# Altium PCB AHT20_DEMO_V1.5.PcbDoc
Units mm, origin at the board's own origin, x right, y up, seen from the top; angles counter-clockwise.
Board outline 91.16 x 34.57 mm, 2 copper layers (Top Layer, Bottom Layer); 46 components, 46 nets, 222 pads, 95 vias.
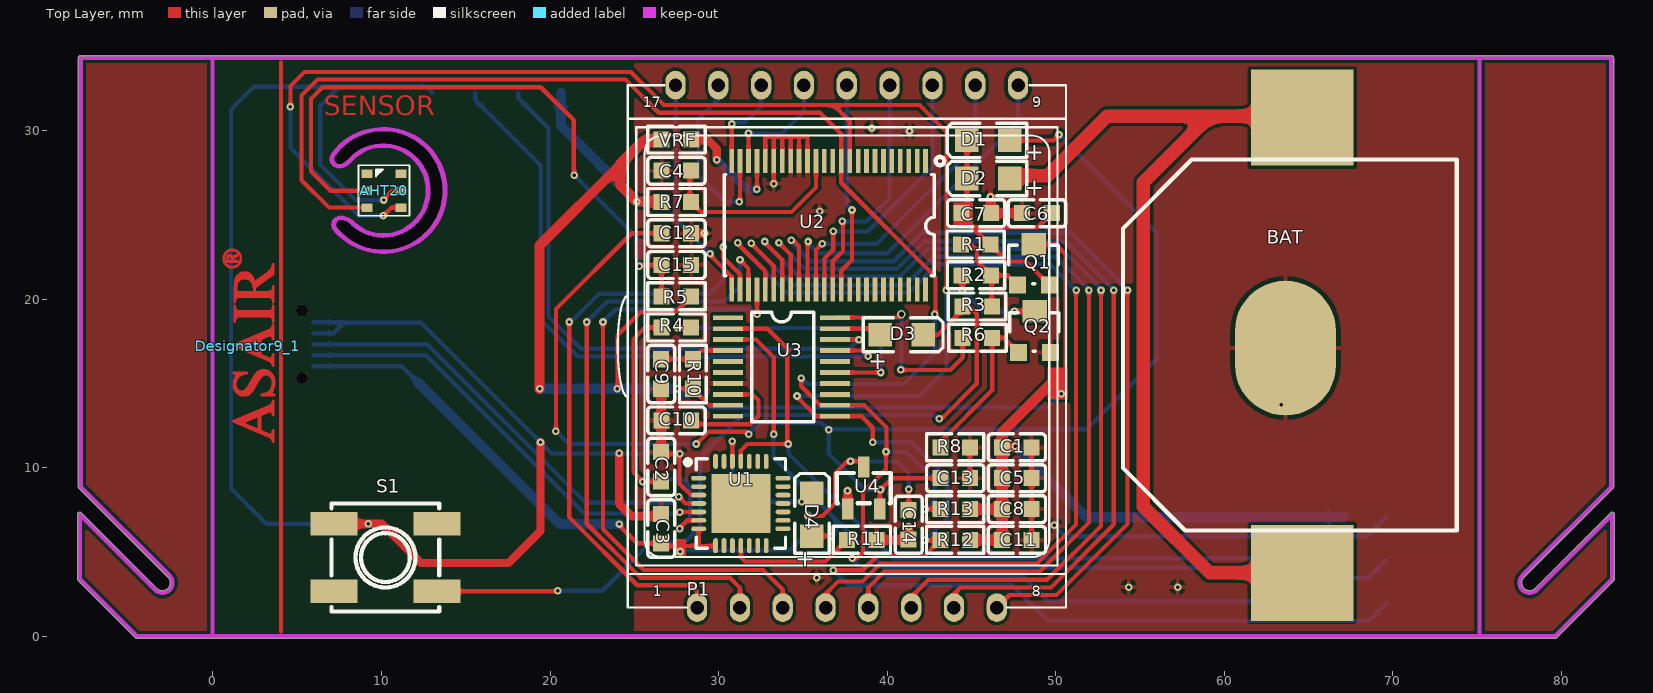
[diagram p0: Top Layer view]
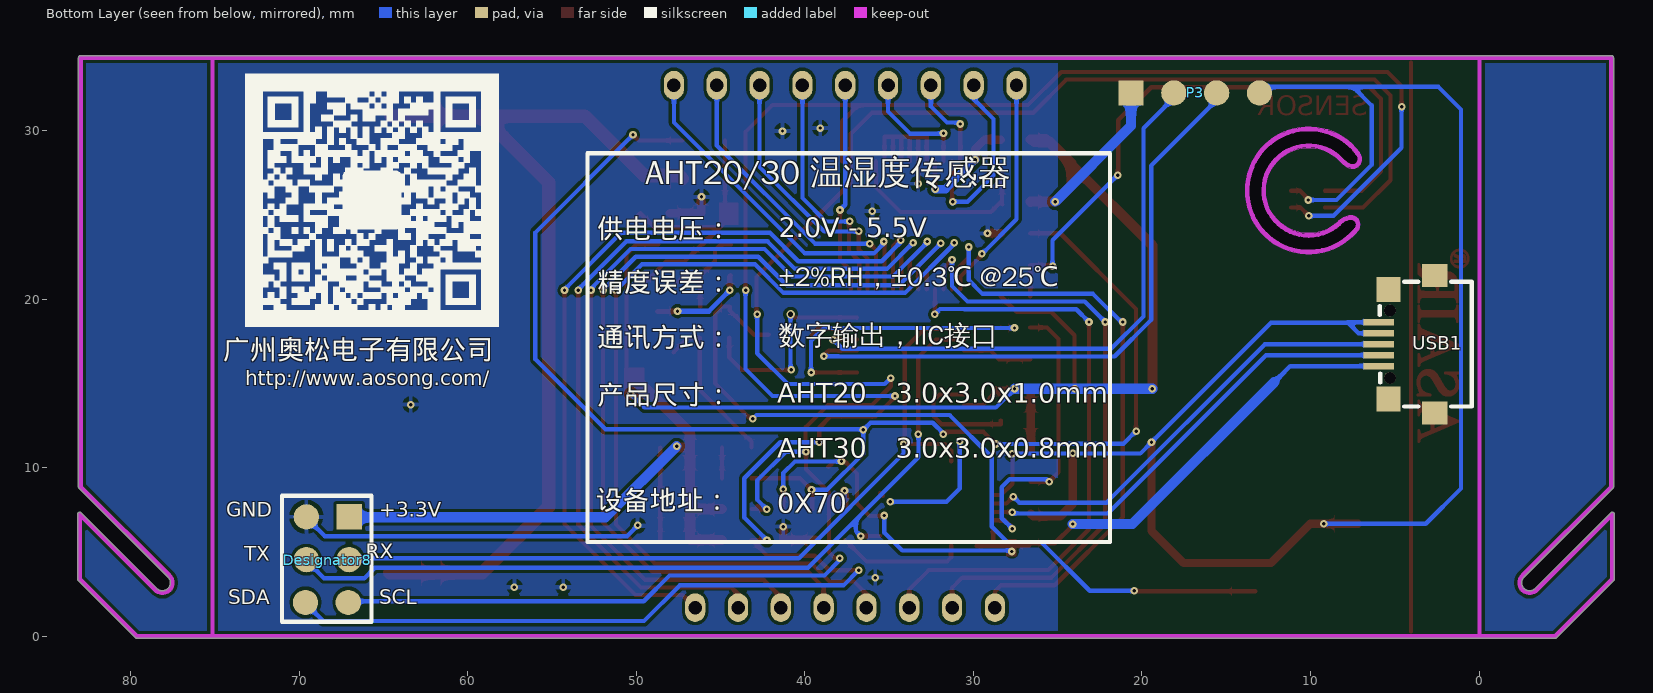
[diagram p1: Bottom Layer view, seen from below]

## Layer stack, top to bottom
Top Solder: solder mask 0.0102, Solder Resist, Dk 3.5
Top Layer: signal copper 0.0356
Dielectric 1: dielectric 0.32, FR-4, Dk 4.8
Bottom Layer: signal copper 0.0356
Bottom Solder: solder mask 0.0102, Solder Resist, Dk 3.5

## Board outline
-4.586,-0.09 -7.989,3.314 -7.989,3.313 cw(c-7.899,3.404) -8.027,3.404 -8.027,7.228 cw(c-7.899,7.228) -7.809,7.318 -3.316,2.825 ccw(c-2.994,3.171) -2.522,3.171 ccw(c-2.994,3.171) -2.676,3.52 ccw(c-2.994,3.171) -2.677,3.521 cw(c-2.591,3.615) -2.681,3.525 -7.939,8.783 -7.938,8.782 cw(c-7.849,8.873) -7.976,8.873 -7.976,34.315 cw(c-7.849,34.315) -7.849,34.443 82.956,34.443 cw(c82.956,34.315) 83.084,34.315 83.084,8.873 cw(c82.956,8.873) 83.046,8.782 83.046,8.783 77.789,3.525 cw(c77.699,3.615) 77.784,3.52 cw(c78.102,3.171) 77.784,3.521 ccw(c77.699,3.615) 77.789,3.525 77.784,3.52 ccw(c78.102,3.171) 78.424,2.825 82.917,7.318 cw(c83.007,7.228) 83.135,7.228 83.135,3.404 cw(c83.007,3.404) 83.097,3.313 83.097,3.314 79.694,-0.09 cw(c79.604,0) 79.604,-0.127 -4.496,-0.127 cw(c-4.496,0)
cut-out: 7.061,24.409 7.061,24.444 cw(c7.535,24.444) 7.2,24.779 7.219,24.798 cw(c7.569,24.448) 7.569,24.943 cw(c7.569,23.896) 8.31,24.636 8.378,24.568 ccw(c10.109,26.441) 12.66,26.441 ccw(c10.109,26.441) 8.276,28.215 cw(c8.184,28.303) 8.274,28.213 8.08,28.019 ccw(c7.99,28.109) 8.081,28.02 8.08,28.019 cw(c7.459,28.641) 7.459,27.762 cw(c7.459,28.236) 7.124,27.901 cw(c7.52,28.297) 6.959,28.297 6.959,28.366 cw(c7.428,28.366) 7.089,28.69 cw(c10.109,26.441) 13.874,26.441 cw(c10.109,26.441) 7.265,23.974 7.224,24.015 ccw(c7.314,24.105) 7.225,24.014 7.224,24.015 cw(c7.619,24.409)

## Design rules (kind name [scope] priority, off if disabled: settings)
Clearance [All] p1: gap=0.2 ignorepadtopadclearanceinfootprint=FALSE
ComponentClearance [All] p1 off: gap=0.2 collisioncheckmode=3 verticalgap=0.254 showdistances=FALSE
DiffPairsRouting DiffPair_DiffPairsRouting [InDifferentialPair ('USB')] p1: maxlimit=0.254 minlimit=0.254 mostfreqgap=0.254 toplayer_minwidth=0.2 toplayer_maxwidth=0.381 toplayer_prefwidth=0.381 bottomlayer_minwidth=0.2 bottomlayer_maxwidth=0.381 bottomlayer_prefwidth=0.381 maxuncoupledlength=12.7
DiffPairsRouting DiffPair_DiffPairsRouting_1 [InDifferentialPair ('USB')] p2: maxlimit=0.254 minlimit=0.254 mostfreqgap=0.254 toplayer_minwidth=0.254 toplayer_maxwidth=0.254 toplayer_prefwidth=0.254 bottomlayer_minwidth=0.254 bottomlayer_maxwidth=0.254 bottomlayer_prefwidth=0.254 maxuncoupledlength=12.7
DiffPairsRouting [All] p3: maxlimit=0.254 minlimit=0.254 mostfreqgap=0.254 toplayer_minwidth=0.381 toplayer_maxwidth=0.381 toplayer_prefwidth=0.381 bottomlayer_minwidth=0.381 bottomlayer_maxwidth=0.381 bottomlayer_prefwidth=0.381 maxuncoupledlength=12.7
HoleSize [All] p1: absolutevalues=TRUE maxlimit=2.54 minlimit=0.02 maxpercent=80.000 minpercent=20.000
MatchedLengths DiffPair_MatchedLengths [InDifferentialPair ('USB')] p1: tolerance=25.4 checknetsindiffpair=FALSE checkdiffpairvsdiffpair=TRUE checkxsignals=TRUE checkothers=TRUE
MatchedLengths DiffPair_MatchedLengths_1 [InDifferentialPair ('USB')] p2: tolerance=25.4 checknetsindiffpair=FALSE checkdiffpairvsdiffpair=TRUE checkxsignals=TRUE checkothers=TRUE
MinimumSolderMaskSliver [All] p1 off: minsoldermaskwidth=0.254
PolygonConnect [All] p1: connectstyle=Relief reliefconductorwidth=0.254 reliefentries=4 polygonreliefangle="90 Angle" airgapwidth=0.254
RoutingVias [All] p1: holewidth=0.711 width=1.27 viastyle="Through Hole" minholewidth=0.711 minwidth=1.27 maxholewidth=0.711 maxwidth=1.27
SilkToSilkClearance [All] p1 off: silktosilkclearance=0.254
SilkToSolderMaskClearance [IsPad] p1 off: minsilkscreentomaskgap=0.254 clearancetoexposedcopper=TRUE
SolderMaskExpansion [All] p1: expansion=0.102
Width [All] p1: maxlimit=2 minlimit=0.2 preferedwidth=0.254
24 further rules are at their usual default settings.

## Components (designator, comment, footprint, x,y, rotation, side; value= is the part's Value field where it differs from the comment)
AHT20 "AHT20" AHT20 8.633,24.913 r0 top
BAT "CR2032" CR2032-W 73.784,6.275 r90 top locked
C1 "106" 0603C 48.565,11.201 r180 top value=105
C2 "104" 0603c 26.594,9.169 r90 top value=10uF
C3 "4.7u" 0603C 26.594,7.264 r270 top value=105
C4 "104" 0603C 26.619,27.614 r0 top
C5 "104" 0603C 48.565,9.373 r180 top
C6 "104" 0603C 49.759,25.095 r180 top
C7 "104" 0603C 44.399,25.095 r0 top
C8 "106" 0603c 46.815,7.544 r0 top value=10uF
C9 "104" 0603C 26.594,14.681 r90 top
C10 "4.7u" 0603C 26.619,12.802 r0 top value=105
C11 "104" 0603C 48.565,5.715 r180 top
C12 "104" 0603C 28.369,23.905 r180 top value=106
C13 "104" 0603C 44.905,9.373 r180 top
C14 "104" 0603C 41.275,5.74 r90 top value=105
C15 "4.7u" 0603C 28.372,22.022 r180 top value=105
D1 "1N5819" 0805-LED 47.269,29.413 r180 top
D2 "1N5819" 0805-LED 47.269,27.153 r180 top
D3 "1N5819" 0805-LED 39.599,17.882 r0 top
D4 "1N5819" 0805-LED 35.535,5.944 r90 top
Designator8 "Comment" H-6 67.053,7.057 r0 bottom
Designator9_1 "Comment" 0603C-L 2.057,17.247 r90 top
P1 "LCD_1485B" LCD1485B 24.61,1.698 r0 top locked
P3 "ST-Link" DIP-5 20.647,32.229 r180 bottom
Q1 "ST2305" SOt23 47.727,20.828 r0 top
Q2 "2N3904" SOt23 47.777,16.84 r0 top
R1 "10K" 0603R 44.374,23.241 r0 top value=100
R2 "10K" 0603R 46.152,21.412 r180 top value=100
R3 "10K" 0603R 46.203,19.558 r180 top value=100
R4 "20K" 0603R 28.372,18.313 r180 top value=100
R5 "470" 0603R 26.619,20.168 r0 top value=4.7K
R6 "10K" 0603R 44.475,17.704 r0 top value=100
R7 "10K" 0603R 28.369,25.76 r180 top
R8 "100K" 0603R 43.155,11.201 r0 top value=100
R10 "10K" 0603R 28.473,14.681 r90 top
R11 "10K" 0603R 37.617,5.715 r0 top value=100
R12 "4.7k" 0603R 44.905,5.715 r180 top value=4.7K
R13 "4.7k" 0603R 44.905,7.544 r180 top value=4.7K
S1 "POWER" KEY 10.233,4.72 r180 top
U1 "CP2102" CP2102 31.496,7.874 r270 top
U2 "PCF8562TT" PCF8562TT 36.903,24.482 r180 top locked
U3 "HC32F003" TSSOP20 30.556,18.898 r0 top locked
U4 "6206-3.3" XC6206 38.608,8.788 r270 top
USB1 "micro 5P_C77238" USB 2.944,17.243 r90 bottom locked
VRF "1K" 0603R 26.619,29.464 r0 top value=10K

## Footprints (in the part's own frame and the unit in brackets; to place one, negate y for a bottom-side part, rotate by r counter-clockwise, add the part's x,y. Pads: shape width x height; smd on the part's side, far side on the other; paste and mask are expansions set on the pad)
0603C [mm]
  rect 0.95x0.95 smd: 1(0,0) 2(1.75,0)
  silkscreen extent -0.83,-0.8 2.58,0.8
0603c [mm]
  rect 0.95x0.95 smd: 1(0,0) 2(1.75,0)
  silkscreen extent -0.83,-0.8 2.58,0.8
0603C-L [mm]
  Top Layer drawing of 2041 lines, arcs and shapes, not listed
0603R [mm]
  rect 0.95x0.95 smd: 1(0,0) 2(1.75,0)
  silkscreen extent -0.82,-0.8 2.58,0.8
0805-LED [mil]
  rect 55x55 smd: 1(0,0) 2(100,0)
  silkscreen extent -40,-40 146,40
AHT20 [mm]
  rect 0.65x0.5 smd: 1(0.508,2.515) 2(0.508,1.515) 3(0.508,0.515) 4(2.515,0.515) 5(2.515,1.515) 6(2.515,2.515)
  silkscreen extent 0,0.03 3.02,3.02
CP2102 [mm]
  oval 0.28x0.896 smd: 1(-1.501,-2.678) 2(-1.001,-2.678) 3(-0.501,-2.678) 4(0,-2.678) 5(0.5,-2.678) 6(1.001,-2.678) 7(1.501,-2.678) 15(1.501,2.322) 16(1.001,2.322) 17(0.5,2.322) 18(0,2.322) 19(-0.501,2.322) 20(-1.001,2.322) 21(-1.501,2.322)
  oval 0.896x0.28 smd: 8(2.5,-1.679) 9(2.5,-1.179) 10(2.5,-0.678) 11(2.5,-0.178) 12(2.5,0.323) 13(2.5,0.823) 14(2.5,1.323) 22(-2.5,1.323) 23(-2.5,0.823) 24(-2.5,0.323) 25(-2.5,-0.178) 26(-2.5,-0.678) 27(-2.5,-1.179) 28(-2.5,-1.679)
  rect 3.5x3.5 smd: 29(0,-0.178)
  silkscreen extent -2.65,-3.48 2.65,2.47
CR2032-W [mil]
  rect 224.41x240.16 smd: 1(-99,360.69) 2(964,360.69)
  rect 60x60 smd: 1(-99,404)
  oval 314.96x236.22 smd: 3(426,400)
  silkscreen extent 0,0 866,780
DIP-5 [mm]
  rect 1.5x1.5 smd: 1(0,0)
  round 1.5 smd: 2(2.54,0) 3(5.08,0) 4(7.62,0)
H-6 [mm]
  rect 1.5x1.5 smd: 1(-0.025,-0.025)
  round 1.5 smd: 2(2.515,-0.025) 3(-0.025,2.515) 4(2.515,2.515) 5(0.025,5.055) 6(2.565,5.055)
KEY [mm]
  rect 2.8x1.4 smd: 1(-3.05,2.051) 2(3.05,2.051) 3(-3.05,-1.949) 4(3.05,-1.949)
  silkscreen extent -3.2,-3.15 3.2,3.25
LCD1485B [mm]
  oval 1.2x1.7 hole 0.8: 1(4.11,0) 2(6.65,0) 3(9.19,0) 4(11.73,0) 5(14.27,0) 6(16.81,0) 7(19.35,0) 8(21.89,0) 9(23.15,30.99) 10(20.61,30.99) 11(18.07,30.99) 12(15.53,30.99) 13(12.99,30.99) 14(10.45,30.99) 15(7.91,30.99) 16(5.37,30.99) 17(2.83,30.99)
  silkscreen extent -0.6,0 26,31
PCF8562TT [mil]
  rect 11x56.3 smd: 1(-211.5,-145.61) 2(-191.8,-145.61) 3(-172.11,-145.61) 4(-152.41,-145.61) 5(-132.72,-145.61) 6(-113.02,-145.61) 7(-93.33,-145.61) 8(-73.63,-145.61) 9(-53.93,-145.61) 10(-34.24,-145.61) 11(-14.54,-145.61) 12(5.16,-145.61) 13(24.85,-145.61) 14(44.54,-145.61) 15(64.24,-145.61) 16(83.94,-145.61) 17(103.63,-145.61) 18(123.33,-145.61) 19(143.02,-145.61) 20(162.72,-145.61) 21(182.41,-145.61) 22(202.11,-145.61) 23(221.8,-145.61) 24(241.5,-145.61) 25(241.5,153.61) 26(221.8,153.61) 27(202.11,153.61) 28(182.41,153.61) 29(162.72,153.61) 30(143.02,153.61) 31(123.33,153.61) 32(103.63,153.61) 33(83.94,153.61) 34(64.24,153.61) 35(44.54,153.61) 36(24.85,153.61) 37(5.16,153.61) 38(-14.54,153.61) 39(-34.24,153.61) 40(-53.93,153.61) 41(-73.63,153.61) 42(-93.33,153.61) 43(-113.02,153.61) 44(-132.72,153.61) 45(-152.41,153.61) 46(-172.11,153.61) 47(-191.8,153.61) 48(-211.5,153.61)
  silkscreen extent -255,-156 258,122
SOt23 [mil]
  rect 40x40 smd: 1(0,0) 2(75,0)
  rect 57.69x52 smd: 3(38,95.75)
  silkscreen extent -20,3 95,93
TSSOP20 [mil]
  rect 70x11 smd: 1(0,0) 2(0,-25.6) 3(0,-51.2) 4(0,-76.8) 5(0,-102.4) 6(0,-128) 7(0,-153.6) 8(0,-179.2) 9(0,-204.8) 10(0,-230.4) 11(250,-230.4) 12(250,-204.8) 13(250,-179.2) 14(250,-153.6) 15(250,-128) 16(250,-102.4) 17(250,-76.8) 18(250,-51.2) 19(250,-25.6) 20(250,0)
  silkscreen extent 55,-243 200,13
USB [mm]
  rect 1.35x1.5 smd: 0(-3.999,-0.314) 0(4.151,-0.314)
  rect 1.5x1.4 smd: 0(-3.174,2.427) 0(3.326,2.427)
  rect 0.4x1.8 smd: 1(-1.22,3.007) 2(-0.57,3.007) 3(0.08,3.007) 4(0.731,3.007) 5(1.381,3.007)
  round 0.7 hole 0.7 unplated: ""(-1.918,2.345) ""(2.08,2.345)
  silkscreen extent -3.61,-2.5 3.79,2.95
XC6206 [mm]
  rect 1.25x0.7 smd: 1(1.25,-0.95) 2(1.25,0.95) 3(-1.25,0)
  silkscreen extent -0.9,-1.6 0.9,1.6

## Part data
C1 C3 C4 C5 C6 C7 C9 C10 C11 C12 C13 C14 C15: library part Cap, "Capacitor", LatestRevisionDate=17-Jul-2002, LatestRevisionNote="Re-released for DXP Platform.", PackageReference=RAD-0.3, Published=8-Jun-2000, Publisher="Altium Limited"
C2 C8: library part "Cap Pol1", "Polarized Capacitor (Radial)", LatestRevisionDate=17-Jul-2002, LatestRevisionNote="Re-released for DXP Platform.", PackageReference=RB7.6-15, Published=8-Jun-2000, Publisher="Altium Limited"
D1 D2 D3 D4: library part "D Schottky", "Schottky Diode", Code_JEDEC=DO-214-AA, LatestRevisionDate=17-Jul-2002, LatestRevisionNote="Re-released for DXP Platform.", PackageReference=SMB, Published=8-Jun-2000, Publisher="Altium Limited"
P1: library part LED1485B, "Header, 17-Pin", LatestRevisionDate=17-Jul-2002, LatestRevisionNote="Re-released for DXP Platform.", Publisher="Altium Limited"
P3: library part "Header 4", "Header, 4-Pin", LatestRevisionDate=17-Jul-2002, LatestRevisionNote="Re-released for DXP Platform.", Publisher="Altium Limited"
Q1: library part MOSFET-P, "P-Channel MOSFET", LatestRevisionDate=17-Jul-2002, LatestRevisionNote="Re-released for DXP Platform.", PackageReference=E3, PackageVersion=1995/1996, Published=8-Jun-2000, Publisher="Altium Limited"
Q2: "NPN General Purpose Amplifier", Code_JEDEC=TO-92A, ComponentLink1Description="Manufacturer Link", ComponentLink1URL=http://www.fairchildsemi.com/, ComponentLink2Description=Datasheet, ComponentLink2URL=http://www.fairchildsemi.com/ds/2N%2F2N3904.pdf, DatasheetVersion=1997, LatestRevisionDate=15-Jan-2003, LatestRevisionNote="PCB Footprint 'BCY-W3/D4.7' replaced", PackageReference=TO-92A, PackageVersion=Sep-1998, Published=8-Jun-2000, Publisher="Altium Limited"
R1 R2 R3 R4 R5 R6 R7 R8 R10 R11 R12 R13 VRF: library part Res2, "Resistor", LatestRevisionDate=17-Jul-2002, LatestRevisionNote="Re-released for DXP Platform.", PackageReference=AXIAL-0.4, Published=8-Jun-2000, Publisher="Altium Limited"
S1: library part SW-PB, "Switch", LatestRevisionDate=17-Jul-2002, LatestRevisionNote="Re-released for DXP Platform.", PackageReference=SPST-2, Published=24-Mar-1999, Publisher="Altium Limited"
U1: library part CP2102_1
U2: BOM_LCSC Assembly=Yes, BOM_Manufacturer=NXP, BOM_BOM_Supplier=LCSC, BOM_Manufacturer Part=PCF8562TT, BOM_Supplier=LCSC, BOM_Supplier Part=C52805, SMT Type=Extend, spicePre=X, spiceSymbolName=PCF8562TT
U3: "MCU"
U4: library part XC6206P282MR_C347374, BOM_LCSC Assembly=Yes, BOM_Manufacturer="Youtai Semiconductor Co., Ltd.", BOM_Manufacturer Part=XC6206P282MR, BOM_Supplier=LCSC, BOM_Supplier Part=C347374, Contributor=LCSC, SMT Type=Extend, spicePre=U, spiceSymbolName=XC6206P282MR_C347374
USB1: BOM_Manufacturer=LCSC, BOM_Manufacturer Part=-, BOM_Supplier=LCSC, BOM_Supplier Part=C77238, Contributor=立创EDA官方封装库, spicePre=U, spiceSymbolName="micro 5P_C77238"

## Via types
v1: diameter 0.45, hole 0.2, Top Layer to Bottom Layer, 94 vias
v2: diameter 0.5, hole 0.3, Top Layer to Bottom Layer, 1 vias

## Nets (pads, with @x,y where several pads share a name; then routed paths per layer and width w, separated by ;. In a path a pad name is that pad's centre, name@x,y a point inside that pad or via, vN(x,y) a via of type N, cw(c..) or ccw(c..) an arc to the next point about the centre after c; other vN are vias at no path point)
3.3OUT: C2.1 R4.2 U1.6 | length 18.9
  Top Layer w0.254: C2.1 v1(25.502,9.169) 24.943,9.728 24.943,17.628 25.629,18.313 R4.2 ; v1(27.686,6.375) 27.686,6.433 28.126,6.873 U1.6
  Bottom Layer w0.254: v1(25.502,9.169) 25.647,9.315 27.846,9.315 28.314,8.846 28.314,7.003 v1(27.686,6.375)
+3.3AV: C12.2 C13.2 D1.1 U4.2 | length 83.1
  Top Layer w0.254: v1@20.371,12.141 v1(20.345,12.167) 20.345,19.406 24.845,23.905 C12.2 ; v1(28.677,11.405) 29.397,12.125 31.639,12.125 v1(31.775,11.989) ; U4.2 39.558,8.646 v1(39.599,8.687) 40.284,9.373 C13.2 ; D1.1 49.86,29.413 v1(50.19,29.743)
  Bottom Layer w0.254: v1(20.345,12.167) 21.089,11.423 24.344,11.423 24.362,11.405 v1(28.677,11.405) ; v1(31.775,11.989) 31.775,12.04 32.403,12.667 36.101,12.667 v1(36.525,12.243) 36.525,10.846 38.684,8.687 v1(39.599,8.687) ; v1@36.525,12.275 51.823,12.275 55.982,16.434 55.982,23.952 v1(50.19,29.743)
+3.3V: C1.2 C5.2 C8.1 C11.2 Designator8.1 P3.1 Q1.3 R5.2 R7.2 R10.1 R12.1 R13.1 U3.9 VRF.1 | length 125.2
  Top Layer w0.254: v1(23.978,14.681) 24.003,14.707 24.003,17.856 25.375,19.228 27.429,19.228 R5.2 ; v1@27.762,14.707 27.788,14.681 R10.1 ; R10.1@28.473,14.351 R10.1 ; R10.1@28.648,14.677 R10.1@28.678,14.707 ; U3.9 29.459,13.696 R10.1 ; Q1.3 49.968,23.26 50.571,22.657 50.571,15.86 ; v1(50.317,14.376) 50.571,14.63 50.571,15.86 ; 50.577,15.855 50.571,15.86
  Top Layer w0.6: v1(19.38,14.681) 19.38,23.19 24.178,27.988 ; VRF.1@26.391,29.312 25.502,29.312 ; R7.2 26.598,25.781 v1(25.146,25.781) 24.178,26.749 24.178,27.988 ; VRF.1 25.654,29.464 25.502,29.312 ; R12.1 C11.2 C8.1 ; R13.1 C8.1 ; v1@47.59,11.278 47.514,11.201 C1.2 ; 50.317,15.606 46.815,12.103 C1.2 ; 24.178,27.988 25.502,29.312 ; 24.178,27.988 24.178,28.064 25.425,29.312 25.502,29.312 ; C8.1 C5.2 C1.2
  Bottom Layer w0.254: P3.1 P3.1@20.749,32.127 ; v1(27.559,14.681) 28.665,13.575 49.516,13.575 v1(50.317,14.376)
  Bottom Layer w0.6: v1(19.38,14.681) v1(23.978,14.681) v1(27.559,14.681) ; P3.1 20.647,30.28 v1(25.146,25.781) ; v1(47.6,11.278) 51.82,7.057 Designator8.1@67.053,7.057
BAT+: BAT.1 BAT.2 D2.1 | length 54.6
  Top Layer w0.8: D2.1 47.447,27.33 49.53,27.33 53.057,30.857 59.128,30.857 ; BAT.2@64.527,30.857 59.128,30.857 ; BAT.1@64.623,3.761 63.523,3.761 59.123,3.761 55.191,7.692 55.191,26.92 59.128,30.857
COM0: P1.14 U2.22 | length 7.1
  Top Layer w0.254: U2.22 v1(31.77,29.838) v1@31.773,29.841
  Bottom Layer w0.254: v1(31.77,29.838) 31.792,29.816 33.754,29.816 35.06,31.122 P1.14
COM1: P1.15 U2.24 | length 5.7
  Top Layer w0.254: U2.24@30.757,28.193 U2.24 v1(30.769,30.387) v1@30.782,30.4
  Bottom Layer w0.254: v1@30.757,30.476 31.568,30.476 32.52,31.428 P1.15
COM2: P1.16 U2.23 | length 11.5
  Top Layer w0.254: v1(31.214,25.777) 31.27,25.833 U2.23
  Bottom Layer w0.254: P1.16 29.98,31.862 28.801,30.683 28.801,27.326 30.35,25.777 v1@31.112,25.777 ; v1(31.214,25.777) v1@31.112,25.777 ; v1@31.239,25.65 v1@31.112,25.777
COM3: P1.17 U2.25 | length 13.5
  Top Layer w0.254: v1(29.489,22.682) 29.489,22.614 30.769,21.334 U2.25
  Bottom Layer w0.254: P1.17 27.44,24.732 v1(29.489,22.682)
CP2102_TX: D4.2 U1.26 | length 8.6
  Top Layer w0.254: v1(30.81,11.557) 30.818,11.549 U1.26 ; D4.2@35.382,8.331 D4.2
  Bottom Layer w0.254: v1(30.81,11.557) 30.81,8.763 31.598,7.976 v1(34.925,7.976)
D+: U1.4 USB1.3 | length 27.1
  Top Layer w0.254: v1(27.635,8.28) 28.041,7.874 U1.4
  Bottom Layer w0.254: USB1.3 12.707,17.323 22.105,7.925 27.28,7.925 v1(27.635,8.28)
D-: U1.5 USB1.2 | length 26.8
  Top Layer w0.254: v1(27.686,7.353) 27.707,7.374 U1.5 U1.5@28.792,7.347
  Bottom Layer w0.254: USB1.2 12.639,16.673 22.03,7.282 27.614,7.282 v1(27.686,7.353)
GND: AHT20.5 BAT.3 C1.1 C2.2 C3.1 C4.1 C5.1 C6.2 C7.2 C8.2 C9.1 C10.1 C11.1 C12.1 C13.1 C14.1 C15.1 Designator8.2 P3.4 Q2.2 R8.2 R11.2 S1.4 U1.3 U2.15 U2.16 U2.17 U2.18 U2.19 U2.20 U3.7 U4.1 USB1.4 USB1.5 | length 163.1
  Top Layer w0.254: v1(10.132,25.879) 10.132,25.936 10.624,26.428 AHT20.5 ; C2.2 26.697,10.816 v1(27.683,10.816) ; v1@27.785,10.816 v1(27.683,10.816) ; U1.3 28.35,8.375 27.681,9.044 27.681,10.814 v1(27.683,10.816) ; U2.20 32.77,29.631 32.941,29.631 32.948,29.638 35.272,29.638 U2.15 ; v1(33.271,26.844) U2.19 33.271,29.561 ; U2.18 33.771,29.604 ; U2.17 34.271,29.628 ; U2.16 34.771,29.636 ; C13.1 R8.2 ; C11.1 C5.1 C1.1
  Top Layer w0.5: S1.4 v1(9.21,6.67) ; v1@9.22,6.68 v1(9.21,6.67) ; v1(19.431,11.506) 19.431,6.248 17.526,4.343 12.344,4.343 10.018,6.67 v1(9.21,6.67) ; v1(24.105,10.846) 24.105,7.849 24.845,7.108 26.437,7.108 C3.1 ; C2.2 C9.1 ; C12.1 29.155,23.905 v1(29.159,23.901) ; v1(37.643,8.636) 37.658,8.621 U4.1 ; R11.2 41.25,5.715 C14.1 v1(41.275,6.502) ; v1(46.126,26.06) 46.149,26.038 C7.2 C6.2
  Bottom Layer w0.254: USB1.4 7.153,17.973 7.803,18.623 ; USB1.5 7.803,18.623 ; v1(9.21,6.67) 3.16,6.67 1.067,8.763 1.067,31.242 2.413,32.588 7.468,32.588 ; v1(10.132,25.879) 8.455,25.879 6.373,27.961 6.373,31.493 7.468,32.588 ; P3.4 12.668,32.588 7.468,32.588 ; v1(27.683,10.816) 27.654,10.846 v1(24.105,10.846) 20.091,10.846 v1(19.431,11.506) 12.344,18.593 7.833,18.593 7.803,18.623 ; v1(49.908,6.575) 50.55,5.932 68.468,5.932 Designator8.2@69.593,7.057
  other v1: 54.328,2.917 57.223,2.917 35.814,3.48 63.373,13.741 35.989,25.218 41.323,29.968 39.088,30.146
NetAHT20_2: AHT20.2 C15.2 R5.1 | length 38.2
  Top Layer w0.254: AHT20.2 6.973,26.428 5.817,27.584 5.817,31.877 6.509,32.569 19.45,32.569 21.412,30.607 v1@21.412,27.457 ; v1(25.298,21.946) 25.375,22.022 C15.2 26.619,22.019 R5.1
  Bottom Layer w0.254: v1(21.438,27.356) 25.298,23.495 v1(25.298,21.946)
NetC4_2: C4.2 R7.1 U2.14 | length 11.8
  Top Layer w0.254: R7.1@28.273,25.607 28.27,25.61 28.296,25.635 C4.2@28.296,27.614 ; R7.1 28.957,25.171 34.317,25.171 35.772,26.627 U2.14
NetC6_1: C6.1 C7.1 D1.2 D2.2 Q1.2 R1.2 | length 17.1
  Top Layer w0.254: D1.2 D2.2 44.729,25.425 C7.1 44.399,24.892 45.034,24.257 ; Q1.2 48.235,22.225 47.14,22.225 R1.2 46.05,23.241 45.034,24.257 ; C6.1@50.114,24.74 C6.1 48.92,24.257 45.034,24.257
NetC10_2: C10.2 U3.8 | length 7.3
  Top Layer w0.254: C10.2 28.369,12.579 31.883,12.579 32.36,13.056 32.36,13.995 32.009,14.346 U3.8
NetD3_2: D3.2 R3.2 S1.1 | length 48.1
  Top Layer w0.254: S1.1 20.412,2.67 20.463,2.72 v1@20.495,2.688 ; D3.2 43.002,17.882 44.453,19.332 R3.2 44.882,19.558 45.311,19.129 45.311,14.983 43.18,12.852 43.129,12.903 v1(43.078,12.903)
  Bottom Layer w0.254: v1(20.463,2.695) 23.091,2.695 25.984,5.588 27.991,5.588 28.905,6.502 28.905,10.62 31.406,13.121 42.86,13.121 v1(43.078,12.903)
NetQ1_2: Q1.1 R1.1 R2.1 R3.1 | length 6.6
  Top Layer w0.254: R1.1 44.992,23.241 45.322,22.911 45.322,22.242 R2.1 ; R3.1 46.203,21.361 R2.1 ; Q1.1 47.142,21.412 R2.1
NetQ2_2: Q2.1 R6.2 R8.1 | length 9.7
  Top Layer w0.254: R8.1 43.155,11.532 46.225,14.602 R6.2 46.914,17.704 Q2.1
NetQ2_3: Q2.3 R2.2 | length 5.7
  Top Layer w0.3: R2.2 44.475,21.339 44.45,21.313 v1(44.45,20.523) ; v1(47.549,19.279) 47.555,19.272 Q2.3
  Bottom Layer w0.3: v1(44.45,20.523) 45.695,19.279 v1(47.549,19.279)
NetR4_1: R4.1 U3.15 | length 17.8
  Top Layer w0.254: v1(27.559,18.288) 28.346,18.288 R4.1 ; U3.15 v1(39.624,15.646)
  Bottom Layer w0.254: v1(27.559,18.288) 38.862,18.288 39.624,17.526 v1(39.624,15.646)
NetR11_1: R11.1 U1.11 | length 7.6
  Top Layer w0.254: U1.11 31.318,4.674 31.554,4.438 36.34,4.438 R11.1
nRESET: C9.2 R10.2 U3.4 | length 4.2
  Top Layer w0.254: C9.2@26.619,16.431 R10.2 28.989,16.947 U3.4
ON/OFF: R6.1 U3.20 | length 12.5
  Top Layer w0.254: U3.20 36.906,18.907 40.649,18.907 v2(40.843,19.101) ; v1(40.792,15.799) 43.739,15.799 44.475,16.535 R6.1
  Bottom Layer w0.254: v1(40.792,15.799) 40.843,15.85 v2(40.843,19.101)
S0: P1.1 U2.26 | length 37.1
  Top Layer w0.254: v1@21.13,18.767 v1(21.13,18.64) 21.13,7.068 25.176,3.023 28.365,3.023 28.72,2.668 P1.1 ; v1(30.277,23.089) 30.277,22.469 31.27,21.476 U2.26
  Bottom Layer w0.254: v1(21.13,18.64) 21.23,18.64 22.9,20.31 29.454,20.31 30.277,21.133 v1(30.277,23.089)
S1: P1.2 U2.27 | length 37.3
  Top Layer w0.254: v1(22.171,18.64) 22.171,6.669 25.364,3.477 30.654,3.477 31.26,2.871 P1.2 ; v1@31.267,22.325 31.265,22.323 31.77,21.817 U2.27
  Bottom Layer w0.254: v1(22.171,18.64) 23.387,19.856 30.346,19.856 31.267,20.777 v1(31.267,22.327)
S2: P1.3 U2.28 | length 36.6
  Top Layer w0.254: v1(23.137,18.64) 23.137,6.346 25.552,3.931 32.639,3.931 33.8,2.769 P1.3 ; U2.28 32.27,19.107 v1(32.281,19.097)
  Bottom Layer w0.254: v1(23.137,18.64) 23.899,19.402 30.534,19.402 30.538,19.406 31.972,19.406 v1(32.281,19.097)
S3: P1.4 U2.29 | length 57.9
  Top Layer w0.254: v1(31.138,23.339) 31.138,23.285 32.77,21.652 U2.29 ; P1.4@36.827,1.698 P1.4 36.34,2.507 37.08,3.247 38.529,3.247 39.596,4.314 48.892,4.314 51.204,6.625 v1(51.204,20.519)
  Bottom Layer w0.254: v1(31.138,23.339) 31.138,23.285 34.052,20.37 41.257,20.37 42.948,22.061 49.661,22.061 v1(51.204,20.519)
S4: P1.5 U2.30 | length 55.6
  Top Layer w0.254: v1(31.925,23.313) 33.271,21.968 U2.30 ; P1.5 38.88,2.887 39.824,3.831 49.052,3.831 51.966,6.745 v1(51.966,20.519)
  Bottom Layer w0.254: v1(31.925,23.313) 34.414,20.824 41.069,20.824 42.76,22.515 50.023,22.515 51.966,20.573 v1(51.966,20.519)
S5: P1.6 U2.31 | length 53.5
  Top Layer w0.254: v1(32.738,23.415) 32.738,23.361 33.771,22.328 U2.31 ; P1.6 41.42,2.329 42.439,3.349 49.483,3.349 52.68,6.545 v1(52.68,20.519)
  Bottom Layer w0.254: v1(32.738,23.415) 32.738,23.361 34.76,21.338 40.759,21.338 42.39,22.969 50.331,22.969 52.68,20.621 v1(52.68,20.519)
S6: P1.7 U2.32 | length 51.4
  Top Layer w0.254: v1(33.576,23.339) 34.271,22.643 U2.32 ; P1.7 43.96,2.506 44.349,2.895 49.708,2.895 53.442,6.628 v1(53.442,20.519)
  Bottom Layer w0.254: v1(33.576,23.339) 35.122,21.792 40.571,21.792 42.202,23.423 50.592,23.423 53.134,20.882 ; 53.134,20.881 53.442,20.573 v1(53.442,20.519)
S7: P1.8 U2.33 | length 49.5
  Top Layer w0.254: v1(34.315,23.495) 34.407,23.495 34.771,23.131 U2.33 ; P1.8 47.243,2.441 50.042,2.441 54.254,6.654 v1(54.254,20.519)
  Bottom Layer w0.254: v1(34.315,23.495) 34.315,23.367 35.436,22.246 40.383,22.246 42.067,23.93 50.902,23.93 54.254,20.577 v1(54.254,20.519)
S8: P1.9 U2.34 | length 21.1
  Top Layer w0.254: U2.34 35.272,23.383 v1(35.303,23.415)
  Bottom Layer w0.254: v1(35.303,23.415) 35.303,23.31 35.902,22.711 39.995,22.711 47.76,30.476 P1.9
S9: P1.10 U2.35 | length 17.9
  Top Layer w0.254: U2.35 35.772,22.918 v1(36.141,23.288)
  Bottom Layer w0.254: v1(36.141,23.288) 39.393,23.288 45.22,29.115 P1.10
S10: P1.11 U2.36 | length 16
  Top Layer w0.254: U2.36 36.272,22.403 36.802,22.932 v1(36.802,24.024)
  Bottom Layer w0.254: v1(36.802,24.024) 36.82,24.006 38.841,24.006 42.68,27.845 P1.11
S11: P1.12 U2.37 | length 14.4
  Top Layer w0.254: U2.37 36.772,22.242 37.379,22.849 37.379,24.565 v1(37.335,24.609)
  Bottom Layer w0.254: v1(37.335,24.609) 38.758,24.609 40.14,25.991 P1.12
S12: P1.13 U2.38 | length 12.5
  Top Layer w0.254: U2.38 37.273,21.676 37.912,22.315 v1(37.912,25.287)
  Bottom Layer w0.254: P1.13 37.6,25.6 v1(37.912,25.287)
SCL: AHT20.3 Designator8.5 R13.2 U2.11 U3.12 | length 119.6
  Top Layer w0.254: AHT20.3 6.881,25.428 5.258,27.051 5.258,32.08 6.201,33.023 24.482,33.023 26.449,31.057 36.018,31.057 37.273,29.802 U2.11 37.273,26.9 42.857,21.316 42.857,19.133 v1(42.824,19.101) ; v1(34.9,15.316) 34.9,14.834 36.038,13.696 U3.12 38.647,13.696 39.951,12.391 39.951,10.97 v1(39.929,10.947) 39.929,9.906 38.565,8.543 38.565,7.196 ; v1(37.922,4.623) 38.202,4.623 38.565,4.987 38.565,7.196 ; 38.583,7.214 38.565,7.196 ; v1(42.266,7.544) R13.2
  Bottom Layer w0.254: v1(34.9,15.316) 35.255,14.961 40.997,14.961 42.824,16.788 v1(42.824,19.101) ; v1(37.922,4.623) 37.922,4.514 38.831,3.606 48.025,3.606 49.553,2.079 67.002,2.079 Designator8.5@67.104,1.977 ; v1(39.929,10.947) 41.123,10.947 42.824,9.246 42.824,8.103 v1(42.266,7.544)
SDA: AHT20.4 Designator8.6 R12.2 U2.10 U3.11 | length 138.4
  Top Layer w0.254: v1(4.597,31.42) 4.597,32.639 5.436,33.477 24.79,33.477 26.757,31.511 36.808,31.511 ; v1(10.106,24.939) 10.596,25.428 AHT20.4 ; v1(34.646,14.249) 34.646,14.199 35.799,13.045 U3.11 38.466,13.045 39.141,12.37 v1(39.141,11.506) ; v1(36.805,3.912) 38.552,3.912 39.408,4.768 42.208,4.768 R12.2@43.129,5.69 ; U2.10 37.773,30.546 36.808,31.511 ; v1(42.24,5.69) R12.2@43.129,5.69 ; R12.2 R12.2@43.129,5.69 ; v1(43.51,20.523) 43.51,29.921 41.921,31.511 36.808,31.511
  Bottom Layer w0.254: v1(4.597,31.42) 4.597,28.975 8.633,24.939 v1(10.106,24.939) ; v1(34.646,14.249) 41.91,14.249 43.51,15.85 v1(43.51,20.523) ; v1(36.805,3.912) 37.698,3.019 47.419,3.019 49.537,0.9 68.567,0.9 Designator8.6@69.644,1.977 ; v1(39.141,11.506) 41.453,11.506 43.586,9.373 43.586,7.036 v1(42.24,5.69)
SDIO: P3.3 U3.17 | length 37.5
  Top Layer w0.254: U3.17 38.578,16.947 38.862,16.662 v1(38.862,16.612)
  Bottom Layer w0.254: P3.3 15.567,31.797 19.454,27.911 19.454,18.767 21.609,16.612 21.627,16.612 21.642,16.597 37.965,16.597 37.98,16.612 v1(38.862,16.612)
SWCLK: P3.2 U3.18 | length 34.9
  Top Layer w0.254: U3.18 v1(38.324,17.597) v1@38.329,17.602
  Bottom Layer w0.254: P3.2 18.107,31.931 19.908,30.13 19.908,18.973 21.83,17.051 37.777,17.051 v1(38.324,17.597)
UART1_RX: Designator8.3 U1.25 U3.2 | length 49.4
  Top Layer w0.254: U3.2 32.883,18.247 34.163,16.967 34.069,16.873 v1@34.069,11.474 ; U1.25 31.318,11.024 31.699,11.405 v1(34.138,11.405)
  Bottom Layer w0.254: v1(34.138,11.405) 34.138,10.843 40.361,4.619 66.952,4.619 Designator8.3@67.053,4.517
UART1_TX: D4.1 Designator8.4 U3.3 | length 50.9
  Top Layer w0.254: U3.3 32.212,17.597 33.274,16.535 v1(33.274,11.989) ; D4.1 v1(36.678,5.944)
  Bottom Layer w0.254: v1@33.249,11.811 33.249,10.617 36.957,6.909 ; v1(36.678,5.944) 36.957,6.223 36.957,6.909 ; Designator8.4@69.593,4.517 68.516,3.44 66.124,3.44 65.504,4.06 39.806,4.06 36.957,6.909
VCC: C3.2 C14.2 U1.7 U1.8 U4.3 USB1.1 | length 50.5
  Top Layer w0.254: v1(24.105,6.655) 24.105,6.579 25.169,5.514 C3.2 26.76,5.349 28.615,5.349 ; C3.2@26.718,5.358 C3.2@26.781,5.421 ; U1.7 28.818,5.552 28.615,5.349 ; U1.8 29.792,5.349 28.615,5.349 ; v1(35.281,7.163) 35.306,7.137 36.168,7.137 36.906,7.875 36.906,9.652 37.643,10.389 v1(37.821,10.389) 38.257,10.389 U4.3 38.435,10.211 U4.3@38.41,10.185 ; C14.2 v1(41.275,8.712)
  Bottom Layer w0.254: USB1.1 11.2,16.022 12.15,15.072 ; v1@27.885,5.08 34.214,5.08 35.281,6.147 v1(35.281,7.163) ; v1(37.821,10.389) 37.839,10.37 40.582,10.37 41.275,9.677 v1(41.275,8.712)
  Bottom Layer w0.6: 12.15,15.072 20.567,6.655 v1(24.105,6.655)
  other v1: 27.711,5.029
VLCD: U2.21 VRF.2 | length 7.2
  Top Layer w0.254: U2.21 v1(32.27,26.524) v1@32.281,26.514
  Top Layer w0.5: VRF.2 29.337,29.464 29.896,28.905 v1(29.896,28.27)
  Bottom Layer w0.5: v1(29.896,28.27) 31.642,26.524 v1(32.27,26.524)
WAKEUP: D3.1 U3.19 | length 2.8
  Top Layer w0.254: U3.19 39.233,18.247 D3.1
pads on no net: AHT20.1 AHT20.6 S1.2 S1.3 U1.1 U1.2 U1.9 U1.10 U1.12 U1.13 U1.14 U1.15 U1.16 U1.17 U1.18 U1.19 U1.20 U1.21 U1.22 U1.23 U1.24 U1.27 U1.28 U1.29 U2.1 U2.2 U2.3 U2.4 U2.5 U2.6 U2.7 U2.8 U2.9 U2.12 U2.13 U2.39 U2.40 U2.41 U2.42 U2.43 U2.44 U2.45 U2.46 U2.47 U2.48 U3.1 U3.5 U3.6 U3.10 U3.13 U3.14 U3.16 USB1. USB1.0
copper on no net: | length 33.8
  Top Layer w0.254: 4.039,0.279 4.039,34.036

## Polygon pours and split planes (outlines as drawn)
no net on Bottom Layer "Bottom Layer" (solid, pour order 48): -0.025,0 -4.496,0 -7.899,3.404 -7.899,7.112 -3.404,2.616 -2.718,2.616 -2.388,2.946 -2.388,3.429 -2.405,3.429 -7.849,8.873 -7.849,34.315 -0.025,34.315
GND on Bottom Layer "Bottom Layer-GND" (solid, remove dead copper, pour order 34): 75.133,0 75.133,34.315 24.994,34.315 24.994,0
no net on Bottom Layer "Bottom Layer" (solid, pour order 44): 75.133,0 79.604,0 83.007,3.404 83.007,7.112 78.511,2.616 77.826,2.616 77.495,2.946 77.495,3.429 77.513,3.429 82.956,8.873 82.956,34.315 75.133,34.315
no net on Top Layer "Top Layer" (solid, pour order 50): -0.025,0 -4.496,0 -7.899,3.404 -7.899,7.228 -3.835,3.164 -3.835,3.124 -3.796,3.124 -3.288,2.616 -2.743,2.616 -2.413,2.946 -2.413,3.437 -7.849,8.873 -7.849,34.315 -0.025,34.315
GND on Top Layer "Top Layer-GND" (solid, remove dead copper, pour order 36): 75.133,0 75.133,34.315 24.994,34.315 24.994,0
no net on Top Layer "Top Layer" (solid, pour order 42): 75.133,0 79.604,0 83.007,3.404 83.007,7.228 78.943,3.164 78.943,3.124 78.903,3.124 78.395,2.616 77.851,2.616 77.521,2.946 77.521,3.437 82.956,8.873 82.956,34.315 75.133,34.315

## Keep-outs
Keep-Out Layer:
  lines w0.254: -4.318,0 -4.496,0 ; -4.496,0 -7.899,3.404 -7.899,3.531 -7.899,7.228 -3.404,2.733 ccw(c-2.994,3.171) -2.591,3.615 -7.849,8.873 -7.849,34.315 -0.025,34.315 ; -4.496,0 -0.025,0 ; -4.496,0 -0.025,0 ; -0.025,0 0.584,0 79.426,0 79.604,0 ; -0.025,0 -0.025,34.315 ; -0.025,0 -0.025,34.315 ; -0.025,34.315 1.473,34.315 82.956,34.315 ; 75.133,0 79.604,0 ; 75.133,0 79.604,0 ; 75.133,0 75.133,34.315 ; 75.133,0 75.133,34.315 ; 75.133,34.315 82.956,34.315 ; 79.604,0 83.007,3.404 83.007,3.531 83.007,7.228 78.512,2.733 cw(c78.102,3.171) 77.699,3.615 82.956,8.873 82.956,34.315 ; 7.087,28.297 ccw(c7.52,28.297) 7.214,27.991 ccw(c7.459,28.236) 7.459,27.889 ccw(c7.459,28.641) 7.99,28.109 8.184,28.303 cw(c10.109,26.441) 8.29,24.476 8.22,24.546 ccw(c7.569,23.896) 7.569,24.816 ccw(c7.569,24.448) 7.309,24.708 7.29,24.689 ccw(c7.535,24.444) 7.188,24.444 7.188,24.409 ccw(c7.619,24.409) 7.314,24.105 7.358,24.061 ccw(c10.109,26.441) 7.187,28.608 ccw(c7.428,28.366) 7.087,28.366 7.087,28.297

## Other copper
Top Layer:
  rectangle net NetC6_1: 43.917,24.384 45.085,25.73
  rectangle net VCC: 27.432,4.724 28.067,5.766
  rectangle net +3.3V: 49.505,14.046 50.724,15.951
  text "SENSOR" at 6.579,30.531 h2

## Silkscreen, mask and mechanical layers (free items; w line width, h text height)
Bottom Overlay:
  drawing of 5101 lines, arcs and shapes, not listed
  text "AHT20/30 温湿度传感器" at 49.454,26.313 h2.5
  text "2.0V - 5.5V" at 41.553,23.287 h2
  text "供电电压：" at 52.319,23.236 h2
  text "±2%RH，±0.3℃ @25℃" at 41.552,20.371 h2
  text "精度误差：" at 52.319,20.036 h2
  text "数字输出，IIC接口" at 41.552,16.903 h2
  text "通讯方式：" at 52.321,16.784 h2
  text "广州奥松电子有限公司" at 74.498,16.053 h2
  text "http://www.aosong.com/" at 73.203,14.58 h1.5
  text "3.0x3.0x1.0mm" at 34.595,13.472 h2
  text "AHT20" at 41.628,13.472 h2
  text "产品尺寸：" at 52.321,13.381 h2
  text "3.0x3.0x0.8mm" at 34.595,10.201 h2
  text "AHT30" at 41.628,10.201 h2
  text "设备地址：" at 52.397,7.107 h2
  text "0X70" at 41.628,6.929 h2
  text "+3.3V" at 65.25,6.803 h1.5
  text "GND" at 74.318,6.778 h1.5
  text "RX" at 66.037,4.335 h1.5
  text "TX" at 73.251,4.17 h1.5
  text "SCL" at 65.25,1.596 h1.5
  text "SDA" at 74.191,1.596 h1.5
Top Solder:
  lines w0.254: 4.039,0.279 4.039,34.036
  text "SENSOR" at 6.579,30.531 h2

## Text inside footprints (layer, text, board x,y; h text height)
D1: Top Overlay "+" at 49.327,29.134 h1 r180
D2: Top Overlay "+" at 49.327,27.026 h1 r180
D3: Top Overlay "+" at 38.887,15.824 h1
D4: Top Overlay "+" at 35.585,3.962 h1 r90
P1: Top Overlay "17" at 25.494,31.38 h0.63; Top Overlay "9" at 48.588,31.38 h0.63; Top Overlay "1" at 26.093,2.38 h0.63; Top Overlay "8" at 48.573,2.38 h0.63